# EAGLE board Arduino-Pro-Mini (EAGLE 9.3.2)
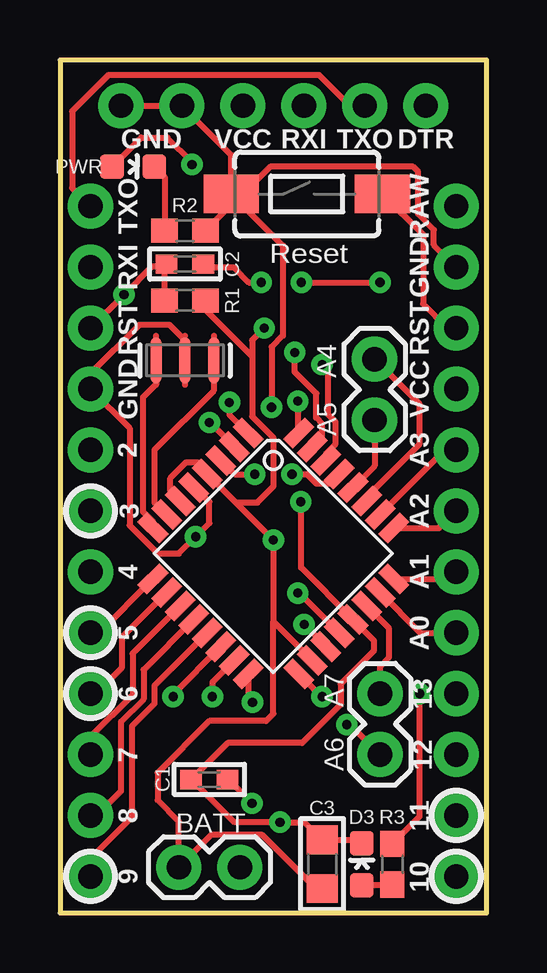
[diagram p0: board, top side]
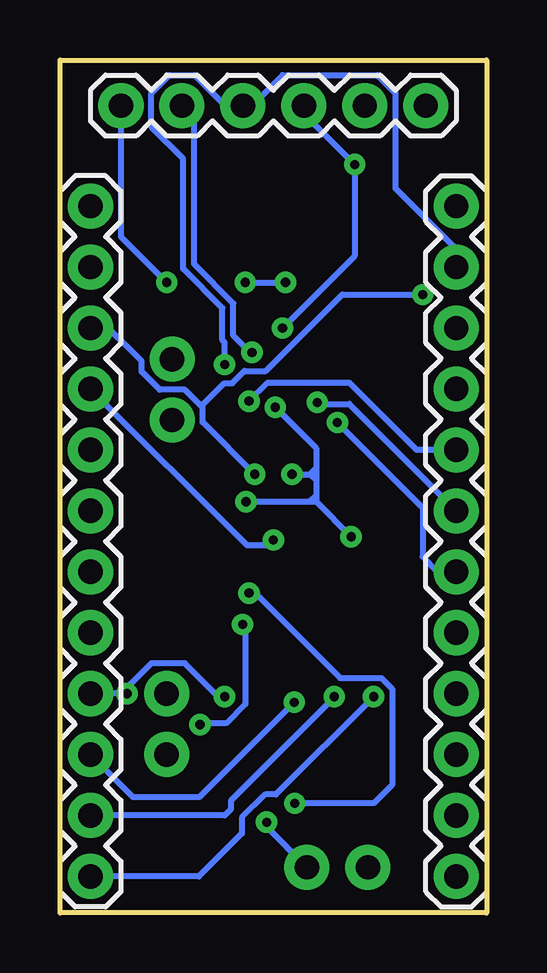
[diagram p1: board, bottom side, seen from below]

Size 17.78 x 35.56 mm. Coordinates in mm from the lower left corner, seen from the top.
Outline: 0,35.56 0,0 17.78,0 17.78,35.56 0,35.56
Copper layers (1*16): Top 0.035mm / dielectric 1.5mm / Bottom 0.035mm
Design rules "SparkFun-2-layer *": minimum track width 10mil, minimum drill 15mil, track to track 8mil, track to pad 8mil, pad to pad 8mil, via to via 8mil, smd to smd 8mil, copper to edge 8mil, drill to drill 8mil, minimum pad ring 12mil, minimum via ring 10mil, stop-mask expansion 4mil, vias tented up to drill 20mil, thermal gap 10mil
Net classes: 0 default: width 0.203 mm; 1 vcc: width 0.254 mm

## Footprints (pad centres in the part's own frame; a part is rotated, then mirrored left to right if it is on the bottom)
1X02 = drill 1.016 pad 1.88: 1 0,0; 2 2.54,0
CAP_0603 = smd 0.9 x 0.8: 1 -0.762,0; 2 0.762,0
CAP_0805 = smd 1.2 x 1.3: 1 -1.016,0; 2 1.016,0
0603-LED-ALT1 = smd 1 x 1: A 0,-0.877; C 0,0.877
1X06 = drill 1.016 pad 1.88: 1 0,0; 2 2.54,0; 3 5.08,0; 4 7.62,0; 5 10.16,0; 6 12.7,0
1X12 = drill 1.016 pad 1.88: 1 0,0; 2 2.54,0; 3 5.08,0; 4 7.62,0; 5 10.16,0; 6 12.7,0; 7 15.24,0; 8 17.78,0; 9 20.32,0; 10 22.86,0; 11 25.4,0; 12 27.94,0
RESONATOR-SMD-1:1 = smd 0.45 x 1.905: 1 -1.2,0; 2 0,0; 3 1.2,0
0603 = smd 1.1 x 1: 1 -0.85,0; 2 0.85,0
TACTILE_SWITCH_SMD_6.0X3.5MM = smd 2.3 x 1.6: 1 -3.15,0; 2 3.15,0
TQFP32-08 = smd 1.27 x 0.559: 1 -4.293,2.8; 2 -4.293,2; 3 -4.293,1.2; 4 -4.293,0.4; 5 -4.293,-0.4; 6 -4.293,-1.2; 7 -4.293,-2; 8 -4.293,-2.8; 17 4.293,-2.8; 18 4.293,-2; 19 4.293,-1.2; 20 4.293,-0.4; 21 4.293,0.4; 22 4.293,1.2; 23 4.293,2; 24 4.293,2.8 | smd 0.559 x 1.27: 9 -2.8,-4.293; 10 -2,-4.293; 11 -1.2,-4.293; 12 -0.4,-4.293; 13 0.4,-4.293; 14 1.2,-4.293; 15 2,-4.293; 16 2.8,-4.293; 25 2.8,4.293; 26 2,4.293; 27 1.2,4.293; 28 0.4,4.293; 29 -0.4,4.293; 30 -1.2,4.293; 31 -2,4.293; 32 -2.8,4.293

## Placement (x,y rotation side)
BATT  [1X02]  4.95,1.91 0 top
C1  0.1uF  [CAP_0603]  6.22,5.56 0 top
C2  0.1uF  [CAP_0603]  5.21,27.05 0 top
C3  10uF  [CAP_0805]  10.92,2.03 90 top
D3  Green  [0603-LED-ALT1]  12.57,2.03 0 top
JP1  FTDI Basic  [1X06]  15.24,33.66 0 bottom
JP2  [1X02]  13.11,23.09 270 top
JP3  [1X02]  13.34,6.6 90 top
JP6  [1X12]  16.51,29.46 270 bottom
JP7  [1X12]  1.27,1.52 90 bottom
PWR  Red  [0603-LED-ALT1]  3.05,31.12 270 top
Q1  8/16/20MHz  [RESONATOR-SMD-1:1]  5.21,23.04 180 top
R1  10K  [0603]  5.21,25.53 0 top
R2  10K  [0603]  5.21,28.45 180 top
R3  330  [0603]  13.84,2.03 270 top
S1  Reset  [TACTILE_SWITCH_SMD_6.0X3.5MM]  10.29,29.97 0 top
U1  ATMEGA328  [TQFP32-08]  8.89,14.99 315 top

## Library data of the parts
BATT JP1-JP3 JP6 JP7 U1 = SparkFun
C1-C3 R1-R3 = Scott-Electrical
D3 PWR Q1 = Testing
S1 = Scott-Switches

## Nets
A0: JP6.8 U1.23
A1: JP6.7 U1.24
A2: JP6.6 U1.25
A3: JP6.5 U1.26
A4: JP2.1 U1.27
A5: JP2.2 U1.28
A6: JP3.1 U1.19
A7: JP3.2 U1.22
AREF: C1.2 U1.20
D2: JP7.8 U1.32
D3: JP7.7 U1.1
D4: JP7.6 U1.2
D5: JP7.5 U1.9
D6: JP7.4 U1.10
D7: JP7.3 U1.11
D8: JP7.2 U1.12
D9: JP7.1 U1.13
D10: JP6.12 U1.14
DTR: C2.2 JP1.1
GND [vcc]: BATT.2 C1.1 C3.2 D3.C JP1.5 JP1.6 JP6.2 JP7.9 Q1.2 R2.1 S1.1 U1.3 U1.5 U1.21
MISO: JP6.10 U1.16
MOSI: JP6.11 U1.15
N$1: Q1.3 U1.8
N$2: Q1.1 U1.7
N$4: PWR.C R2.2
N$7: D3.A R3.2
RAW [vcc]: JP6.1
RESET: C2.1 JP6.3 JP7.10 R1.1 S1.2 U1.29
RXI: JP1.3 JP7.11 U1.30
SCK: JP6.9 R3.1 U1.17
TXO: JP1.2 JP7.12 U1.31
VCC: BATT.1 C3.1 JP1.4 JP6.4 PWR.A R1.2 U1.4 U1.6 U1.18

## Tracks (layer width: path | path; a pad name or v marks a point on that pad's centre or on a via)
A0
  Top 0.254: U1.23 15.02,11.68 JP6.8
A1
  Top 0.254: U1.24 16.22,13.93 JP6.7
A2
  Top 0.254: U1.25 15.79,16.04 JP6.6
A3
  Top 0.254: JP6.5 16.04,19.3 U1.26
A4
  Top 0.254: U1.27 12.77,17.35 14.99,19.56 14.99,21.21 JP2.1
A5
  Top 0.254: JP2.2 13.11,18.64 U1.28
A6  (via drill 0.38)
  Top 0.254: JP3.1 12.09,7.85 v11.95,7.85 | v10.17,12.03 11.08,11.12 U1.19
  Bottom 0.254: v10.17,12.03 10.06,11.91 10.06,8.71 10.86,7.91 11.89,7.91 v11.95,7.85
A7
  Top 0.254: U1.22 13.72,11.86 13.72,10.67 13.34,10.29 JP3.2
AREF  (via drill 0.38)
  Top 0.254: U1.20 9.94,13.37 v9.91,13.33 | v8,4.57 7.01,5.56 C1.2
  Bottom 0.254: v9.91,13.33 9.65,13.33 6.11,9.79 4.39,9.79 3.94,9.34 3.94,5.33 4.7,4.57 v8,4.57
D2  (via drill 0.38)
  Top 0.254: v9.91,21.34 9.91,20.04 U1.32
  Bottom 0.254: JP7.8 2.92,19.3 5.71,22.1 9.14,22.1 v9.91,21.34
D3  (via drill 0.38)
  Top 0.254: U1.1 7.06,20.78 v7.06,21.28
  Bottom 0.254: v7.06,21.28 7,21.22 5.73,21.22 JP7.7
D4  (via drill 0.38)
  Top 0.254: U1.2 6.26,20.45 v6.22,20.45
  Bottom 0.254: v6.22,20.45 2.67,16.89 2.67,14.86 2.03,14.22 JP7.6
D5
  Top 0.254: U1.9 1.63,11.68 JP7.5
D6
  Top 0.254: U1.10 2.56,11.49 2.56,10.21 1.5,9.14 JP7.4
D7
  Top 0.254: U1.11 3.02,10.82 3.02,9.1 1.27,7.35 JP7.3
D8
  Top 0.254: U1.12 3.48,10.14 3.48,8.91 2.54,7.97 2.54,5.08 1.52,4.06 JP7.2
D9
  Top 0.254: U1.13 3.94,9.47 3.94,8.72 3,7.78 3,4 1.27,2.27 JP7.1
D10  (via drill 0.38)
  Top 0.254: U1.14 4.71,9.11 v4.71,9.02
  Bottom 0.254: JP6.12 11.99,1.52 10.2,3.31 10.2,3.98 9.24,4.94 8.79,4.94 v4.71,9.02
DTR  (via drill 0.38)
  Top 0.254: C2.2 6.1,26.92 7.24,26.92 7.87,26.29 v8.38,26.29 | v10.06,26.29 v13.34,26.29
  Bottom 0.254: JP1.1 15.24,28.19 v13.34,26.29 | v10.06,26.29 v8.38,26.29
GND  (via drill 0.38)
  Top 0.254: C1.1 5.47,5.57 | 5.47,5.57 6.99,7.09 10.09,7.09 11.7,8.7 11.7,9.55 13.08,10.93 13.08,11.36 U1.21 10.05,14.4 10.05,17.13 v10.03,17.14 | 5.47,5.57 7.26,3.79 v9.17,3.79 10.19,3.79 C3.2 12.43,3.05 D3.C | U1.5 5.63,17.74 6.22,17.14 6.22,16.26 v5.65,15.68 4.95,14.99 4.07,14.99 2.9,16.16 2.9,20.22 JP7.9 1.27,22.48 3.3,24.51 4.57,24.51 5.21,23.88 Q1.2 | JP1.6 JP1.5 7.14,31.6 S1.1 | S1.1 6.99,29.97 7.11,29.85 7.11,29.5 R2.1 | JP6.2 15.58,27.85 15.58,28.47 14.92,29.14 14.92,30.91 14.72,31.1 8.75,31.1 7.62,29.97 S1.1 | S1.1 9.28,27.83 9.28,24.06 8.81,23.59 v8.81,21.08 | U1.3 7.29,18.29 v8.12,18.29
  Bottom 0.254: BATT.2 9.17,3.58 v9.17,3.79 | v10.03,17.14 7.37,17.14 | 7.37,17.14 7.11,17.14 | 7.11,17.14 v5.65,15.68 | v8.81,21.08 7.11,19.38 7.11,18.54 | 7.11,18.54 7.11,18.29 | 7.11,18.29 7.11,18.03 | 7.11,18.03 7.11,17.4 | 7.11,17.4 7.11,17.14 | 7.37,17.14 7.11,17.4 | v8.12,18.29 7.37,18.29 | 7.37,18.29 7.11,18.29 | 7.37,18.29 7.11,18.54 | 7.37,18.29 7.11,18.03
MISO  (via drill 0.38)
  Top 0.254: U1.16 7.83,8.97 v8.02,8.79
  Bottom 0.254: JP6.10 14.73,4.83 11.98,4.83 v8.02,8.79
MOSI  (via drill 0.38)
  Top 0.254: U1.15 6.35,9.62 v6.35,9.02
  Bottom 0.254: JP6.11 10.92,4.06 10.65,4.33 10.65,4.68 6.35,8.98 v6.35,9.02
N$1
  Top 0.254: U1.8 3.88,16.31 3.46,16.72 3.46,21.5 4.01,22.04 Q1.3
N$2
  Top 0.254: U1.7 3.94,17.11 3.94,19.3 6.4,21.77 Q1.1
N$4
  Top 0.254: PWR.C 4.36,30.68 R2.2
N$7
  Top 0.254: D3.A 13.82,1.16 R3.2
RESET  (via drill 0.38)
  Top 0.254: 4.36,26.96 C2.1 | JP6.3 16.14,24.38 15.13,25.4 15.13,28.28 S1.2 | JP7.10 v2.67,25.78 3.85,26.96 4.36,26.96 | v9.66,18.29 10.29,18.29 10.69,17.89 11.23,17.89 U1.29 | R1.1 4.36,26.96
  Bottom 0.254: JP6.3 15.76,24.38 14.38,23 14.38,22.56 13.63,21.82 12.58,21.82 11.89,21.13 | v9.66,18.29 11.84,20.46 11.84,21.08 11.89,21.13 | 11.89,21.13 10.94,22.09 10.6,22.09 10.09,22.59 9.2,22.59 6.02,25.78 v2.67,25.78
RXI  (via drill 0.38)
  Top 0.254: U1.30 11.08,19.14 11.49,19.55 11.49,20.47 11.18,20.78 11.18,22.61 v10.92,22.86
  Bottom 0.254: JP7.11 1.27,27.67 3.81,30.21 3.81,34.18 4.55,34.92 8.51,34.92 9.78,33.66 JP1.3 10.9,33.66 12.17,34.92 13.23,34.92 13.97,34.18 13.97,32.77 12.65,31.45 12.65,26.86 11.01,25.22 11.01,23.87 10.92,23.79 v10.92,22.86
SCK  (via drill 0.38)
  Top 0.254: v10.92,9.02 10.9,9.02 U1.17 | R3.1 14.99,4.03 v14.99,9.14
  Bottom 0.254: v10.92,9.02 11.18,9.02 12.57,10.41 13.97,10.41 14.99,9.4 v14.99,9.14 JP6.9
TXO  (via drill 0.38)
  Top 0.254: JP1.2 12.06,33.66 10.79,34.92 2.01,34.92 0.51,33.42 0.51,30.23 JP7.12 | U1.31 10.92,19.85 10.92,20.39 10.67,20.64 10.67,21 10.68,21.02 10.68,21.66 9.78,22.56 v9.78,23.37
  Bottom 0.254: v9.78,23.37 9.86,23.37 10.55,24.06 10.55,25.41 12.19,27.05 12.19,33.15 JP1.2
VCC  (via drill 0.38)
  Top 0.254: 8.89,12.16 U1.18 | C3.1 10.67,1.02 8.43,3.25 6.3,3.25 BATT.1 4.95,3.81 4.06,4.7 4.06,5.84 6.22,8 8.59,8 8.89,8.3 8.89,12.16 | PWR.A 3.38,32.33 4.47,32.33 5.5,31.3 v5.5,31.2 | v8.51,24.38 8,23.88 8,23.2 | 8,23.2 8,20.7 8.89,19.81 8.89,17.78 8.22,17.11 7.33,17.11 | U1.6 5.01,17.19 4.59,17.6 4.59,18.13 5.26,18.8 5.71,18.8 6.14,18.37 U1.4 7.33,17.11 | 7.33,17.11 v8.89,15.55 8.89,12.16 | 8,23.2 6.06,25.15 R1.2
  Bottom 0.254: JP6.4 10,15.33 9.11,15.33 v8.89,15.55 | JP1.4 7.62,33.32 v5.5,31.2 5.5,27.39 v8.51,24.38

## Text on the board
tPlace: GND | VCC | RXI | TXO | DTR | TXO | RAW | RXI | Reset | GND | RST | RST | A4 | GND | VCC | A5 | 2 | A3 | 3 | A2 | 4 | A1 | 5 | A0 | 6 | 13 | A7 | 7 | A6 | 12 | 8 | 11 | 9 | 10